# Altium PCB Balance.PcbDoc
Units mil, origin at the board's own origin, x right, y up, seen from the top; angles counter-clockwise.
Board outline 4680 x 2515 mil, 2 copper layers (Top Layer, Bottom Layer); 55 components, 59 nets, 296 pads, 0 vias.
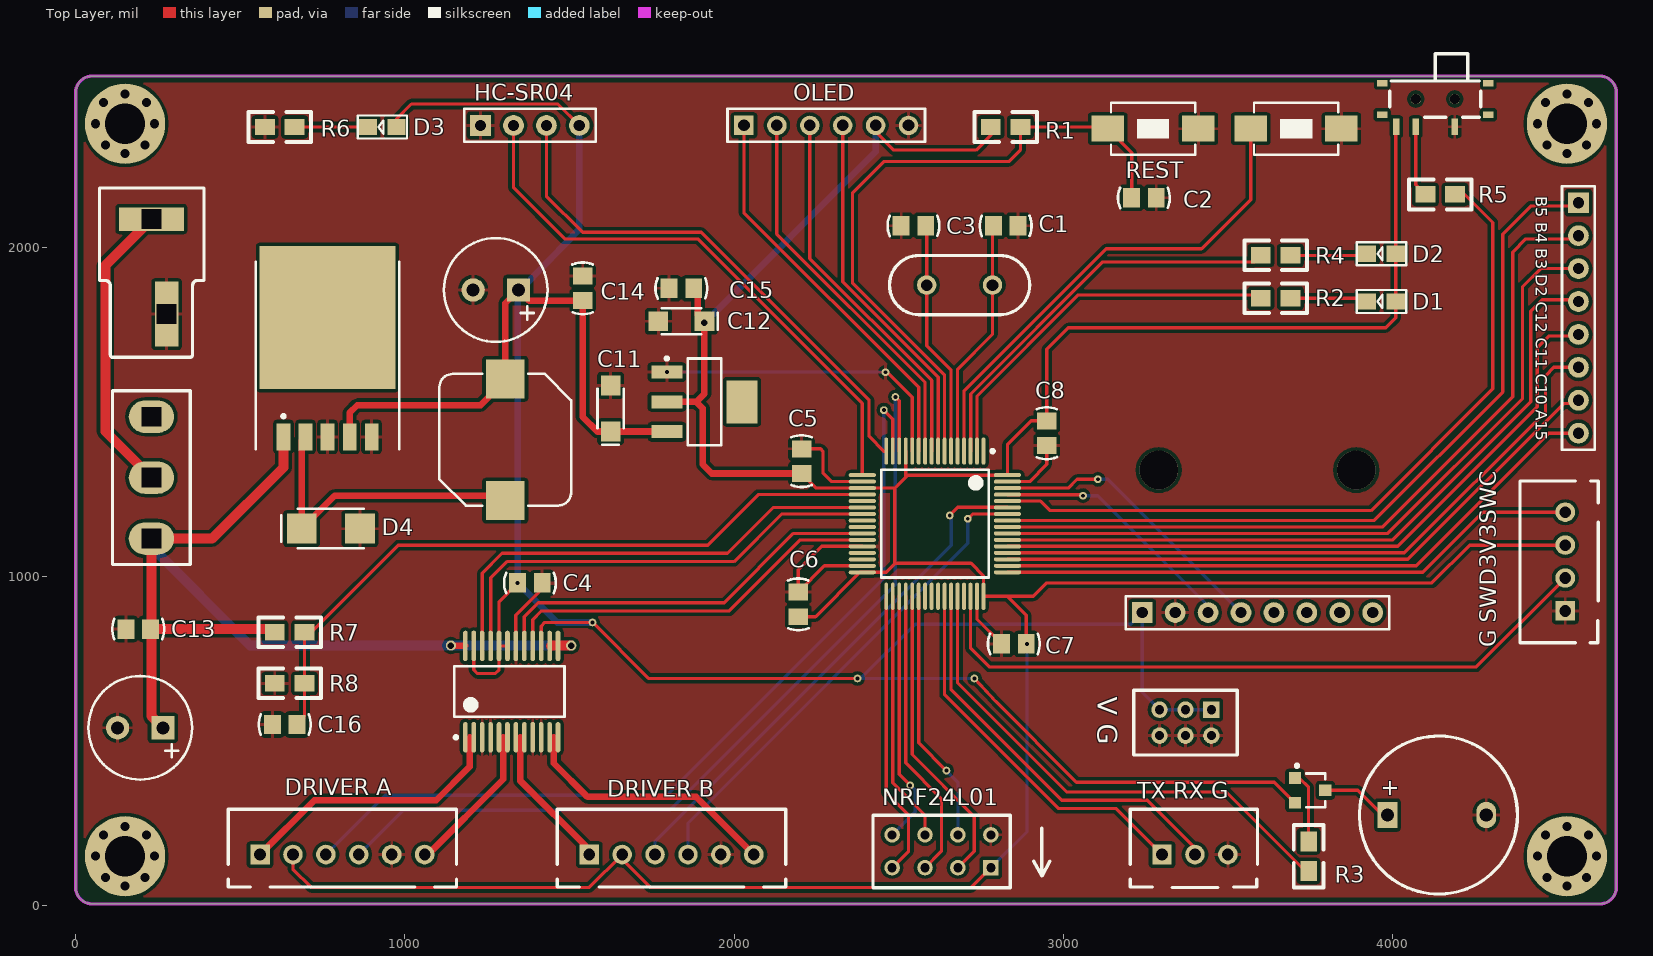
[diagram p0: Top Layer view]
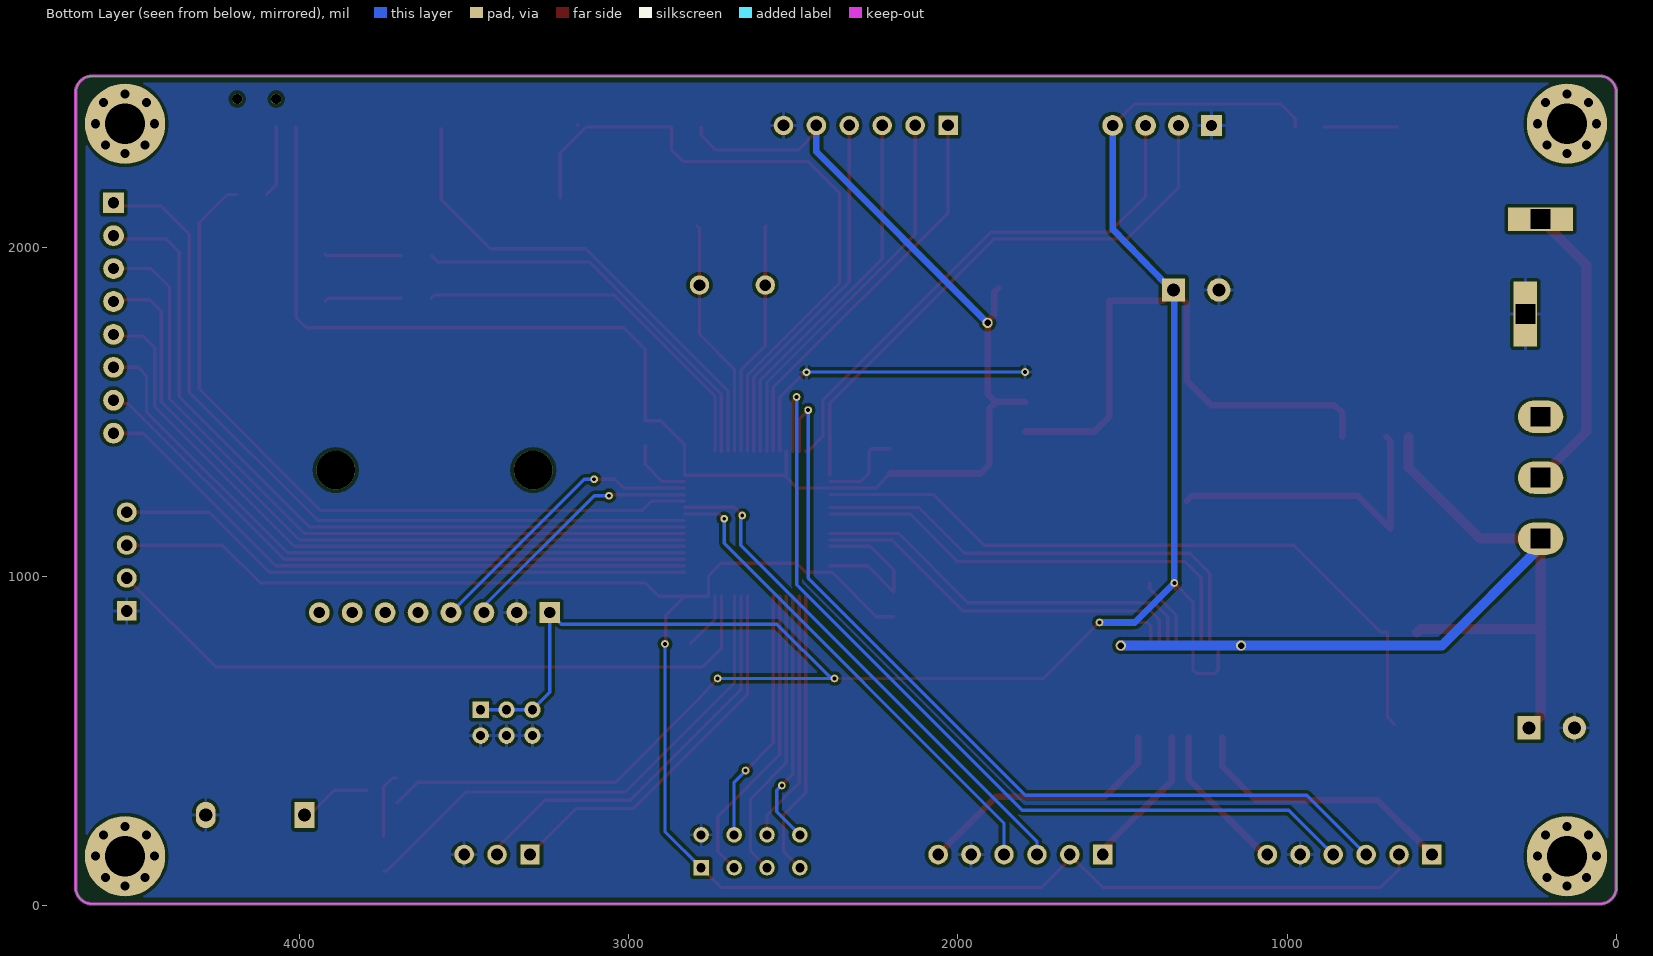
[diagram p1: Bottom Layer view, seen from below]

## Layer stack, top to bottom
Top Solder: solder mask 0.4, Solder Resist, Dk 3.5
Top Layer: signal copper 1.4
Dielectric 1: dielectric 12.6, FR-4, Dk 4.8
Bottom Layer: signal copper 1.4
Bottom Solder: solder mask 0.4, Solder Resist, Dk 3.5

## Board outline
50,5 cw(c50,55) 0,55 0,2470 cw(c50,2470) 50,2520 4630,2520 cw(c4630,2470) 4680,2470 4680,55 cw(c4630,55) 4630,5

## Design rules (kind name [scope] priority, off if disabled: settings)
Clearance POLY-ALL [InPolygon] p1: gap=10 ignorepadtopadclearanceinfootprint=FALSE
Clearance room [WithinRoom('Room32')] p2: gap=0 ignorepadtopadclearanceinfootprint=FALSE
Clearance [All] p3: gap=8 ignorepadtopadclearanceinfootprint=FALSE
PolygonConnect [All] p1: connectstyle=Relief reliefconductorwidth=10 reliefentries=4 polygonreliefangle="90 Angle" airgapwidth=10
RoomDefinition Room32 [All] p1: confinementstyle=ConfineOut formatcopy=TRUE lockcomponents=FALSE outline 2325,1440 2895,1440 2895,875 2325,875
RoutingVias [All] p1: holewidth=28 width=50 viastyle="Through Hole" minholewidth=28 minwidth=50 maxholewidth=28 maxwidth=50
SolderMaskExpansion [All] p1: expansion=2.5
Width [All] p1: maxlimit=35 minlimit=10 preferedwidth=10
30 further rules are at their usual default settings.

## Classes and differential pairs
component class Balance: "B5 B4 B3 D2 C12 C11 C10 A15" C1 C2 C3 C4 C5 C6 C7 C8 C11 C12 C13 C14 C15 C16 D1 D2 D3 D4 "G SWD3V3SWC" HC-SR04 NRF24L01 OLED R1 R2 R3 R4 R5 R6 R7 R8 "TX RX G"

## Components (designator, comment, footprint, x,y, rotation, side; value= is the part's Value field where it differs from the comment)
B1 "BEEP" BEEP 3985,275 r0 top
"B5 B4 B3 D2 C12 C11 C10 A15" "Header 8" SIP8X2.54MM 4565,2135 r270 top (schematic designator P1)
C1 "20pF" C-RAD-0805 2825,2065 r180 top
C2 "104" C-RAD-0805 3245,2150 r180 top
C3 "20pF" C-RAD-0805 2545,2065 r0 top
C4 "104" C-RAD-0805 1380,980 r180 top
C5 "104" C-RAD-0805 2205,1350 r270 top
C6 "104" C-RAD-0805 2195,915 r270 top
C7 "104" C-RAD-0805 2850,795 r0 top
C8 "104" C-RAD-0805 2950,1435 r90 top
C9 "220uF" C-RB-8 265,540 r180 top
C10 "220uF" C-RB-8 1345,1870 r180 top
C11 "10uF" CAP-1206 1625,1510 r90 top
C12 "10uF" CAP-1206 1840,1775 r180 top
C13 "104" C-RAD-0805 190,840 r0 top
C14 "104" C-RAD-0805 1540,1875 r270 top
C15 "104" C-RAD-0805 1840,1875 r0 top
C16 "104" C-RAD-0805 635,550 r0 top
D1 "LED" SMDLED 4010,1835 r180 top
D2 "LED" SMDLED 4010,1980 r180 top
D3 "LED" SMDLED 975,2365 r180 top
D4 "D-Schottky" SMA 775,1145 r180 top
"DRIVER A" "Header 6" XH-6P 560,155 r0 top (schematic designator Driver1)
"DRIVER B" "Header 6" XH-6P 1560,155 r0 top (schematic designator Driver2)
"G SWD3V3SWC" "Header 4" XH-4P 4525,895 r90 top (schematic designator SWD)
H1 "HOLE(S)" HOLE9 150,150 r0 top locked
H2 "HOLE(S)" HOLE9 4530,150 r0 top locked
H3 "HOLE(S)" HOLE9 4530,2375 r0 top locked
H4 "HOLE(S)" HOLE9 150,2375 r0 top locked
HC-SR04 "Header 4" SIP4X2.54MM 1230,2370 r0 top
K2 "KEY_M" SW2P3X6X4.3(SMD) 3705,2360 r270 top
L1 "L" L-SMD-10 1305,1415 r90 top
NRF24L01 "NRF24L01" NRF24L01 2780,215 r90 top (schematic designator U1)
OLED "" SIP6X2.54MM 2030,2370 r0 top
Q1 "SS9012" SOT-23 3750,350 r270 top
R1 "10K" 0805 2870,2365 r180 top
R2 "10K" 0805 3690,1845 r180 top
R3 "1K" 0805 3745.06,105 r90 top
R4 "10K" 0805 3690,1975 r180 top
R5 "10K" 0805 4190,2160.06 r180 top
R6 "10K" 0805 665,2365 r180 top
R7 "10K" 0805 695,830 r180 top
R8 "10K" 0805 605,675 r0 top
REST "KEY_M" SW2P3X6X4.3(SMD) 3275,2360 r90 top (schematic designator K1)
S1 "SW-SPDT" switch 230,1485 r270 top
SW1 "SW3_7" MSK-02-7 4130,2450 r180 top
T "TCON" Tcon 230,2000 r90 top
"TX RX G" "Header 3" XH-3P 3300,155 r0 top (schematic designator USRAT)
U2 "MPU6050" SIP8X2.54MM 3240,890 r0 top
U3 "LM2596T-5.0" TO-263-5 765,1590 r0 top
U4 "AMS1117" AMS-1117 1910,1530 r0 top
U5 "STM32F103R" LQFP-64 2610,1160 r270 top
U6 "TB6612FNG" SSOP-24 1350,650 r90 top
"V G" "Header3X2" HDR3X2 3450,595 r180 top (schematic designator P)
Y1 "8MHz" XTAL 2685,1885 r90 top

## Footprints (in the part's own frame and the unit in brackets; to place one, negate y for a bottom-side part, rotate by r counter-clockwise, add the part's x,y. Pads: shape width x height; smd on the part's side, far side on the other; paste and mask are expansions set on the pad)
0805 [mil]
  rect 60x50 smd: 1(0,-0.06) 2(90,-0.06)
  silkscreen extent -50,-45 140,45
AMS-1117 [mm]
  rect 2.4x1 smd: 1(-2.9,2.3) 2(-2.9,0) 3(-2.9,-2.3)
  rect 2.4x3.3 smd: 4(2.9,0)
  silkscreen extent -3.02,-3.35 1.3,3.47
BEEP [mil]
  rect 60x80 hole 40: 1(0,0)
  oval 60x80 hole 40: 2(300,0)
  silkscreen extent -85,-240 395,240
C-RAD-0805 [mm] "贴片电容"
  rect 1.3x1.5 smd: 1(-0.95,0) 2(0.95,0)
  silkscreen extent -2,-0.79 2,0.79, body extent -1.27,-0.64 1.27,0.64, height 0.9
C-RB-8 [mm] "35V 220UF电容"
  rect 1.8x1.8 hole 1: 1(0,0)
  round 1.8 hole 1: 2(3.5,0)
  silkscreen extent -2.25,-4 5.75,4
CAP-1206 [mil] "贴片元件"
  rect 60x60 smd: 1(-70,0) 2(70,0)
  silkscreen extent -110,-40 60,40, body extent -65,-35 65,35, height 39
HDR3X2 [mm]
  rect 1.27x1.27 hole 0.711: 1(0,0)
  round 1.27 hole 0.711: 2(0,2) 3(2,0) 4(2,2) 5(4,0) 6(4,2)
  silkscreen extent -2,-1.5 6,3.5
HOLE9 [mm]
  round 0.7 hole 0.7: 1(-2.286,0) 1(-1.651,1.651) 1(-1.524,-1.651) 1(0,-2.286) 1(0,2.286) 1(1.524,-1.651) 1(1.651,1.651) 1(2.286,0)
  round 6.2 hole 3.1: 1(0,0)
L-SMD-10 [mm] "贴片电感10*10"
  rect 3x3 smd: 1(-4.699,0) 2(4.699,0)
  silkscreen extent -5.08,-5.08 5.08,5.08, body extent -5.08,-5.08 5.08,5.08, height 4
LQFP-64 [mm] "LQFP64"
  oval 2.1x0.3 smd: 1(-5.6,3.75) 2(-5.6,3.25) 3(-5.6,2.75) 4(-5.6,2.25) 5(-5.6,1.75) 6(-5.6,1.25) 7(-5.6,0.75) 8(-5.6,0.25) 9(-5.6,-0.25) 10(-5.6,-0.75) 11(-5.6,-1.25) 12(-5.6,-1.75) 13(-5.6,-2.25) 14(-5.6,-2.75) 15(-5.6,-3.25) 16(-5.6,-3.75) 33(5.6,-3.75) 34(5.6,-3.25) 35(5.6,-2.75) 36(5.6,-2.25) 37(5.6,-1.75) 38(5.6,-1.25) 39(5.6,-0.75) 40(5.6,-0.25) 41(5.6,0.25) 42(5.6,0.75) 43(5.6,1.25) 44(5.6,1.75) 45(5.6,2.25) 46(5.6,2.75) 47(5.6,3.25) 48(5.6,3.75)
  oval 0.3x2.1 smd: 17(-3.75,-5.6) 18(-3.25,-5.6) 19(-2.75,-5.6) 20(-2.25,-5.6) 21(-1.75,-5.6) 22(-1.25,-5.6) 23(-0.75,-5.6) 24(-0.25,-5.6) 25(0.25,-5.6) 26(0.75,-5.6) 27(1.25,-5.6) 28(1.75,-5.6) 29(2.25,-5.6) 30(2.75,-5.6) 31(3.25,-5.6) 32(3.75,-5.6) 49(3.75,5.6) 50(3.25,5.6) 51(2.75,5.6) 52(2.25,5.6) 53(1.75,5.6) 54(1.25,5.6) 55(0.75,5.6) 56(0.25,5.6) 57(-0.25,5.6) 58(-0.75,5.6) 59(-1.25,5.6) 60(-1.75,5.6) 61(-2.25,5.6) 62(-2.75,5.6) 63(-3.25,5.6) 64(-3.75,5.6)
  silkscreen extent -5.72,-4.15 4.15,4.58, body extent -5,-5 5,5, height 1.6
MSK-02-7 [mm] "拨动开关 7脚 SMD"
  rect 0.8x0.5 smd: 0(-4.1,-1.215) 0(-4.1,1.215) 0(4.1,-1.215) 0(4.1,1.215)
  round 0.8 hole 0.8: 0(-1.5,0) 0(1.5,0)
  rect 0.5x1.25 smd: 1(-1.5,2.134) 2(1.5,2.134) 3(3,2.134)
  silkscreen extent -3.5,-3.5 3.5,1.4
NRF24L01 [mm]
  round 1.2 hole 0.7: 1(0,0) 3(0,2.54) 4(-2.54,2.54) 5(0,5.08) 6(-2.54,5.08) 7(0,7.62) 8(-2.54,7.62)
  rect 1.2x1.2 hole 0.7: 2(-2.54,0)
  silkscreen extent -4.09,-1.5 1.5,9.09
SIP4X2.54MM [mm]
  rect 1.6x1.6 hole 0.87: 1(0,0)
  round 1.6 hole 0.87: 2(2.54,0) 3(5.08,0) 4(7.62,0)
  silkscreen extent -1.27,-1.27 8.89,1.27, body extent -1.27,-1.27 8.89,1.27, height 8.54
SIP6X2.54MM [mm]
  rect 1.5x1.5 hole 0.9: 1(0,0)
  round 1.5 hole 0.9: 2(2.54,0) 3(5.08,0) 4(7.62,0) 5(10.16,0) 6(12.7,0)
  silkscreen extent -1.27,-1.27 13.97,1.27
SIP8X2.54MM [mm]
  rect 1.6x1.6 hole 0.87: 1(0,0)
  round 1.6 hole 0.87: 2(2.54,0) 3(5.08,0) 4(7.62,0) 5(10.16,0) 6(12.7,0) 7(15.24,0) 8(17.78,0)
  silkscreen extent -1.27,-1.27 19.05,1.27, body extent -1.27,-1.27 19.05,1.27, height 8.54
SMA [mm] "贴片二极管"
  rect 2.3x2.3 smd: 1(-2.25,0) 2(2.25,0)
  silkscreen extent -2.54,-1.52 3.81,1.52, body extent -2.92,-1.4 2.92,1.4, height 3
SMDLED [mm]
  rect 1.4x1.27 smd: 1(0.001,-0.002) 2(2.211,-0.002)
  silkscreen extent -0.8,-0.89 3.01,0.89
SOT-23 [mm]
  rect 0.9x0.95 smd: 1(-0.95,-1.175) 2(0.95,-1.175) 3(0,1.175)
  silkscreen extent -2.03,-1.14 1.3,1.18
SSOP-24 [mm] "SSOP, 28-Leads, Body 10.20x5.30mm, Pitch 0.65mm, IPC Low Density"
  oval 2.35x0.36 smd: 1(-3.525,4.225) 2(-3.525,3.575) 3(-3.525,2.925) 4(-3.525,2.275) 5(-3.525,1.625) 6(-3.525,0.975) 7(-3.525,0.325) 8(-3.525,-0.325) 9(-3.525,-0.975) 10(-3.525,-1.625) 11(-3.525,-2.275) 12(-3.525,-2.925) 13(3.525,-2.925) 14(3.525,-2.275) 15(3.525,-1.625) 16(3.525,-0.975) 17(3.525,-0.325) 18(3.525,0.325) 19(3.525,0.975) 20(3.525,1.625) 21(3.525,2.275) 22(3.525,2.925) 23(3.525,3.575) 24(3.525,4.225)
  silkscreen extent -3.65,-3.43 1.95,5.08
SW2P3X6X4.3(SMD) [mm]
  rect 2x2.5 smd: 1(0,3.556) 2(0,-3.444)
  silkscreen extent -2,-3.19 2,3.31, body extent -2.03,-3.18 2.03,3.3, height 1.2
switch [mm]
  oval 2.5x3.5 hole 1.5 square: 1(0,0) 2(4.7,0) 3(9.4,0)
  silkscreen extent -2,-3 11.4,3
Tcon [mm]
  rect 5x1.8 hole 1.5 square: 1(-5.159,-1.175)
  rect 1.8x5 hole 1.5 square: 2(2.159,0)
  silkscreen extent -8.5,-4.06 4.57,4
TO-263-5 [mm] "贴片LM2596"
  rect 1.05x2.1 smd: 1(-3.4,-4.225) 2(-1.7,-4.225) 3(0,-4.225) 4(1.7,-4.225) 5(3.4,-4.225)
  rect 10.5x11 smd: 6(0,4.987)
  silkscreen extent -5.55,-5.17 5.55,9.28, body extent -5.33,-4.7 5.33,10.29, height 3
XH-3P [mm]
  rect 1.5x1.524 hole 0.9: 1(0,0)
  oval 1.5x1.524 hole 0.9: 2(2.54,0) 3(5.08,0)
  silkscreen extent -2.46,-2.54 7.37,3.5
XH-4P [mm]
  rect 1.5x1.524 hole 0.9: 1(0,0)
  oval 1.5x1.524 hole 0.9: 2(2.54,0) 3(5.08,0) 4(7.62,0)
  silkscreen extent -2.46,-2.54 10.03,3.5
XH-6P [mm]
  rect 1.5x1.524 hole 0.9: 1(0,0)
  oval 1.5x1.524 hole 0.9: 2(2.54,0) 3(5.08,0) 4(7.62,0)
  round 1.524 hole 0.9: 5(10.16,0) 6(12.7,0)
  silkscreen extent -2.46,-2.5 15.16,3.5
XTAL [mm] "CRYSTA"
  round 1.5 hole 0.889: 1(0,2.54) 2(0,-2.54)
  silkscreen extent -2.29,-5.41 2.29,5.41

## Part data
B1: "蜂鸣器"
"B5 B4 B3 D2 C12 C11 C10 A15" "DRIVER A" "DRIVER B" "G SWD3V3SWC" HC-SR04 "TX RX G" "V G": "接插件"
C1 C2 C3 C4 C5 C6 C7 C8 C13 C14 C15 C16: library part C, "无极性电容"
C9 C10 C11 C12: library part CAP, "极性电容"
D1 D2 D3: "发光二极管"
D4: "肖特基二极管"
K2 REST: "轻触按键"
L1: "电感"
NRF24L01: "无线模块"
OLED: library part "Header 6", "接插件"
Q1: library part SS8550, "PNP贴片三极管"
R1 R2 R3 R4 R5 R6 R7 R8: library part R
S1: "开关"
SW1: "3脚2档侧面拨动 7Pin微动开关"
T: "T插"
U3: "5V稳压芯片"
U4: "3.3V稳压"
U5: "STM32单片机48引脚"
U6: "电机驱动"
Y1: library part XTAL, "Crystal Oscillator"

## Free pads (board coordinates)
  round 31.5 hole 19.68: 0(1910,1770) 3(1140,790) 3(1505,790)
  round 23.62 hole 11.81: 0(2460,1620) 1(1795.83,1620.55) 2(1342.6,980) 2(2645,410) 2(3105,1295) 3(2535,365) 3(3060,1245) 4(2455,1505) 4(2730,690) 5(2490,1545) 6(2710,1175) 6(2890,795) 7(1570,860) 7(2655,1185) 8(2375,690)
  round 118.11 hole 118.11: 0(3290,1323.07) 0(3890,1323.07)

## Nets (pads, with @x,y where several pads share a name; then routed paths per layer and width w, separated by ;. In a path a pad name is that pad's centre, name@x,y a point inside that pad or via, vN(x,y) a via of type N, cw(c..) or ccw(c..) an arc to the next point about the centre after c; other vN are vias at no path point)
3V3: "DRIVER A.2" "DRIVER B.2" "G SWD3V3SWC.3" C5.2 C6.2 C7.2 C8.2 C12.1 C15.2 D1.1 D2.1 NRF24L01.2 OLED.5 pad.0@1910,1770 pad.6@2890,795 R1.2 SW1.3 U4.2 U5.13 U5.19 U5.32 U5.48 U5.64 | length 11068.1
  Top Layer w10: 660,155 660,110 715,55 1560,55 1660,155 1660,140 1745,55 2720,55 NRF24L01.2 ; C6.2 2247.6,877.6 2382.36,1012.36 U5.32 2462.36,1012.36 2490,1040 2720,1040 2757.64,1002.36 U5.48 2830,939.53 ; C5.2 2249.33,1268.27 U5.19 2488.27,1268.27 ; OLED.5 2430,2350 2485,2295 2735,2295 2780,2340 R1.2 ; 2488.27,1038.27 2488.27,1268.27 ; U5.13 2521.42,1301.42 ; pad.6@2890,795 2889.92,795.44 2887.4,810 2887.4,882.13 2830,939.53 ; SW1.3 4009.97,2364.08 D2.1 D1.1 4009.97,1784.97 3980,1755 3015,1755 2950,1690 C8.2 2902.4,1472.4 2830.47,1400.47 U5.64 2527.64,1307.64 2521.42,1301.42 ; 4525,1095 4235,1095 4120,980 2950,980 2909.53,939.53 2830,939.53 ; 2488.27,1268.27 2521.42,1301.42
  Top Layer w20: U4.2 1885,1530 ; C15.2 1890,1862.4 1890,1795 C12.1 1910,1770 1910,1555 1885,1530 ; C5.2 1932.4,1312.6 1905,1340 1905,1510 1885,1530
  Bottom Layer w10: NRF24L01.2 2890,225 pad.6@2890,795
  Bottom Layer w20: pad.0@1910,1770 2430,2290 OLED.5
5V: "V G.1" "V G.3" "V G.5" C4.2 C10.1 C11.1 C14.2 D3.1 HC-SR04.4 L1.2 pad.2@1342.6,980 pad.4@2730,690 pad.7@1570,860 pad.8 Q1.2 U2.1 U3.4 U4.3 U6.15 U6.19 U6.20 U6.23 | length 8563.7
  Top Layer w10: D3.1 974.97,2389.97 1020,2435 1465,2435 HC-SR04.4 ; U6.23 1209.25,715.75 1220,705 1275,705 1286.02,716.02 U6.20 ; U6.19 U6.20 ; C4.2@1340,960 C4.2 1286.02,923.43 U6.20 ; U6.15 1413.98,848.98 1425,860 1570,860 1740,690 pad.8 ; pad.4@2730,690 2795,620 3040,375 3641.34,375 Q1.2
  Top Layer w20: U3.4 831.93,1496.93 855,1520 1230,1520 1305,1595 L1.2 1305,1830 C10.1 1377.4,1837.6 C14.2 1540,1485 1585,1440 C11.1 1795.27,1440 U4.3
  Bottom Layer w10: pad.8 pad.8@2385,690 ; pad.4@2730,690 pad.8@2385,690 ; 3450,595 3371.26,595 3292.52,595 3240,647.52 U2.1 3205,855 2550,855 pad.8@2385,690
  Bottom Layer w20: C10.1 1342.6,1867.6 1342.6,980 1462.6,860 pad.7@1570,860 ; C10.1@1360,1870 1360,1880 1530,2055 HC-SR04.4
ADC: C16.2 R7.1 R8.2 U5.20 | length 2157.3
  Top Layer w10: C16.2 695,572.6 R7.1 715.06,830.06 980,1095 1920,1095 2073.58,1248.58 U5.20
AO1: "DRIVER A.1" U6.1 U6.2 | length 836.6
  Top Layer w20: 560,155 725,320 1095,320 1196.46,421.46 1196.46,511.22
AO2: "DRIVER A.6" U6.5 U6.6 | length 461
  Top Layer w20: 1060,155 1070,155 1298.82,383.82 1298.82,511.22
BEEP: R3.1 U5.44 | length 1566.2
  Top Layer w10: U5.44 2678.9,676.1 3010,345 3495,345 3735,105 R3.1
BO1: "DRIVER B.1" U6.7 U6.8 | length 443.2
  Top Layer w20: 1350,511.22 1350,380 1560,170 1560,155
BO2: "DRIVER B.6" U6.11 U6.12 | length 801.2
  Top Layer w20: 1452.36,511.22 1452.36,432.64 1555,330 1885,330 2060,155
BOOT0: R5.1 U5.60 | length 2295
  Top Layer w10: U5.60 2931.1,1228.9 2960,1200 3935,1200 4305,1570 4305,2075 4219.94,2160.06 R5.1
D/C: OLED.1 U5.11 | length 1209.4
  Top Layer w10: OLED.1 2030,2105 2560.79,1574.21 U5.11
ECHO: HC-SR04.2 U5.17 | length 1738.5
  Top Layer w10: HC-SR04.2 1330,2180 1485,2025 1890,2025 2389.53,1525.47 U5.17
GND: "DRIVER A.5" "DRIVER B.5" "G SWD3V3SWC.1" "TX RX G.3" "V G.2" "V G.4" "V G.6" B1.2 C1.1 C2.1 C3.1 C4.1 C5.1 C6.1 C7.1 C8.1 C9.2 C10.2 C11.2 C12.2 C13.1 C14.1 C15.1 C16.1 D4.1 HC-SR04.1 K2.1 NRF24L01.1 OLED.6 pad.0@2460,1620 pad.1 R6.2 R8.1 REST.2 SW1.1 T.1 U2.2 U3.3 U3.5 U4.1 U5.12 U5.18 U5.28 U5.31 U5.47 U5.63 U6.3 U6.4 U6.9 U6.10 U6.18 | length 2309.8
  Top Layer w10: U6.18 1337.2,882.2 1417.4,962.4 C4.1 ; C5.1 2262.6,1387.4 2270,1380 2270,1315 2297.05,1287.95 U5.18 ; U5.31 2274.65,1032.05 C6.1 2195,1020 2266.1,1091.1 U5.28 ; pad.0@2470,1615 2541.1,1543.9 U5.12 ; U5.47 2737.95,869.65 C7.1 ; U5.63 2897.95,1287.95 2950,1340 C8.1
  Bottom Layer w10: pad.1 2459.45,1620.55 pad.0@2460,1620
IICSCL: pad.3@3060,1245 U2.3 U5.61 | length 771.4
  Top Layer w10: U5.61 2831.25,1247.8 3060,1247.8 pad.3@3060,1245
  Bottom Layer w10: pad.3@3060,1245 3105,1245 3440,910 U2.3
IICSDA: pad.2@3105,1295 U2.4 U5.62 | length 888.4
  Top Layer w10: U5.62 3015,1268.27 3041.73,1295 pad.2@3105,1295
  Bottom Layer w10: pad.2@3105,1295 3135,1295 U2.4
KEY1: K2.2 U5.4 | length 1510.1
  Top Layer w10: U5.4 2698.58,1563.58 3130,1995 3420,1995 3569.41,2144.41 K2.2
LED1: R2.2 U5.2 | length 1160.6
  Top Layer w10: U5.2 2737.95,1547.5 3045.46,1855 3590.06,1855 R2.2
LED2: R4.2 U5.3 | length 1229.7
  Top Layer w10: U5.3 2719.05,1380.47 2719.05,1554.05 3120.06,1955.06 3580,1955.06 R4.2
NetB1_1: B1.1 Q1.3 | length 211.9
  Top Layer w10: Q1.3 3895,350 B1.1@3975,270
NetD1_2: D1.2 R2.1 | length 237.1
  Top Layer w10: R2.1 3912.96,1845.06 D1.2
NetD2_2: D2.2 R4.1 | length 235
  Top Layer w10: R4.1 3917.96,1975.06 D2.2
NetD3_2: D3.2 R6.1 | length 223
  Top Layer w10: R6.1 D3.2
NetD4_2: D4.2 L1.1 U3.2 | length 949.7
  Top Layer w20: U3.2 686.42,1412.01 D4.2 786.42,1245 1290,1245 L1.1
NetP1_1: "B5 B4 B3 D2 C12 C11 C10 A15.1" U5.57 | length 2411.3
  Top Layer w10: U5.57 3944.84,1169.84 4335,1560 4335,2040 4420,2125 4565,2125
NetP1_2: "B5 B4 B3 D2 C12 C11 C10 A15.2" U5.56 | length 2354.6
  Top Layer w10: U5.56 3970.16,1150.16 4365,1545 4365,1985 4405,2025 4565,2025
NetP1_3: "B5 B4 B3 D2 C12 C11 C10 A15.3" U5.55 | length 2266.9
  Top Layer w10: U5.55 3985.47,1130.47 4395,1540 4395,1880 4450,1935 4565,1935
NetP1_4: "B5 B4 B3 D2 C12 C11 C10 A15.4" U5.54 | length 2197.7
  Top Layer w10: U5.54 4000.79,1110.79 4420,1530 4420,1805 4455,1840 4565,1840
NetP1_5: "B5 B4 B3 D2 C12 C11 C10 A15.5" U5.53 | length 2104.6
  Top Layer w10: U5.53 4016.1,1091.1 4440,1515 4440,1695 4475,1730 4565,1730
NetP1_6: "B5 B4 B3 D2 C12 C11 C10 A15.6" U5.52 | length 2032.4
  Top Layer w10: U5.52 4036.42,1071.42 4465,1500 4465,1610 4490,1635 4565,1635
NetP1_7: "B5 B4 B3 D2 C12 C11 C10 A15.7" U5.51 | length 1930.6
  Top Layer w10: U5.51 4046.73,1051.73 4520,1525 4565,1525
NetP1_8: "B5 B4 B3 D2 C12 C11 C10 A15.8" U5.50 | length 1901.4
  Top Layer w10: U5.50 4072.05,1032.05 4475,1435 4565,1435
NetQ1_1: Q1.1 R3.2 | length 202.6
  Top Layer w10: Q1.1 3717.6,387.4 3745.06,359.94 R3.2@3745.06,210
NetR5_2: R5.2 SW1.2 | length 217.9
  Top Layer w10: SW1.2 4070.94,2189.18 R5.2
NetS1_2: S1.2 T.2 | length 901
  Top Layer w30: S1.2 90,1439.96 90,1945 T.2
NRF_CE: NRF24L01.3 pad.2@2645,410 U5.38 | length 773.9
  Top Layer w10: U5.38 2560.79,494.21 pad.2@2645,410
  Bottom Layer w10: pad.2@2645,410 2680,375 NRF24L01.3
NRF_CS: NRF24L01.4 U5.37 | length 923.5
  Top Layer w10: U5.37 2541.1,458.9 2730,270 2730,165 NRF24L01.4
NRF_IRQ: NRF24L01.8 U5.33 | length 873.3
  Top Layer w10: U5.33 2462.36,342.64 2530,275 2530,165 NRF24L01.8
OSCIN: C1.2 U5.5 Y1.2 | length 731.6
  Top Layer w10: U5.5 2678.9,1628.9 2785,1735 Y1.2 2785,2057.4 C1.2@2792.6,2065
OSCOUT: C3.2 U5.6 Y1.1 | length 716.3
  Top Layer w10: C3.2 2585,2062.4 Y1.1 2585,1700 2659.21,1625.79 U5.6
PA0: "DRIVER A.4" pad.5 U5.14 | length 2709
  Top Layer w10: pad.5 2501.73,1533.27 U5.14
  Bottom Layer w10: 860,155 995,290 1805,290 2490,975 pad.5
PA1: "DRIVER A.3" pad.4@2455,1505 U5.15 | length 2688.7
  Top Layer w10: pad.4@2455,1505 2482.05,1477.95 U5.15
  Bottom Layer w10: 760,155 940,335 1795,335 2455,995 pad.4@2455,1505
PA6: U5.22 U6.22 | length 1458.3
  Top Layer w10: U6.22 1234.84,1009.84 1295,1070 1980,1070 2119.21,1209.21 U5.22
PA7: U5.23 U6.21 | length 1416.1
  Top Layer w10: U6.21 1260.43,995.43 1310,1045 2000,1045 2144.53,1189.53 U5.23
PB0: U5.26 U6.17 | length 1220.4
  Top Layer w10: U6.17 1362.8,877.8 1405,920 1970,920 2180.47,1130.47 U5.26
PB1: U5.27 U6.16 | length 1181.2
  Top Layer w10: U6.16 1388.39,868.39 1415,895 1985,895 2200.79,1110.79 U5.27
PB6: "DRIVER B.4" pad.6@2710,1175 U5.58 | length 1498.6
  Top Layer w10: pad.6@2710,1175 2724.53,1189.53 U5.58
  Bottom Layer w10: 1860,155 1860,250 2710,1100 pad.6@2710,1175
PB7: "DRIVER B.3" pad.7@2655,1185 U5.59 | length 1591.2
  Top Layer w10: pad.7@2655,1185 2679.81,1209.81 2830.47,1209.81 U5.59
  Bottom Layer w10: 1760,155 1760,195 2660,1095 2660,1180 pad.7@2655,1185
RESET: C2.2 R1.1 REST.1 U5.7 | length 2034.3
  Top Layer w10: U5.7 2639.53,1610.93 2360,1890.46 2360,2165 2455,2260 2835,2260 2870,2295 R1.1 REST.1@3129.94,2365.06 ; REST.1 3207.6,2287.4 C2.2 ; REST.1@3154.94,2370.06 REST.1@3155,2370
RST: OLED.2 U5.10 | length 1176.1
  Top Layer w10: OLED.2 2130,2040 2580,1590 2580,1380.94 U5.10
RX: "TX RX G.2" U5.43 | length 1243.7
  Top Layer w10: U5.43 2659.21,655.79 2995,320 3255,320 3400,175 3400,155
SCL: OLED.4 U5.8 | length 1109.6
  Top Layer w10: OLED.4 2330,1895 2619.84,1605.16 U5.8
SDA: OLED.3 U5.9 | length 1142.9
  Top Layer w10: OLED.3 2230,1965.46 2600.16,1595.3 U5.9
SPI2_MISO: NRF24L01.7 pad.3@2535,365 U5.35 | length 773.5
  Top Layer w10: U5.35 2501.73,398.27 pad.3@2535,365
  Bottom Layer w10: NRF24L01.7 2550,285 2550,350 pad.3@2535,365
SPI2_MOSI: NRF24L01.6 U5.36 | length 890.2
  Top Layer w10: U5.36 2521.42,433.58 2630,325 2630,165 NRF24L01.6
SPI2_SCK: NRF24L01.5 U5.34 | length 765.1
  Top Layer w10: U5.34 2482.05,372.95 2580,275 NRF24L01.5
SWC: "G SWD3V3SWC.4" U5.49 | length 1770.2
  Top Layer w10: U5.49 4092.36,1012.36 4275,1195 4525,1195
SWD: "G SWD3V3SWC.2" U5.46 | length 2099.9
  Top Layer w10: U5.46 2718.27,781.73 2775,725 4255,725 4525,995
TRIG: HC-SR04.3 U5.16 | length 1632.6
  Top Layer w10: HC-SR04.3 1430,2155 1540,2045 1900,2045 2410,1535 2410,1425 2454.53,1380.47 U5.16
TX: "TX RX G.1" U5.42 | length 1160.6
  Top Layer w10: U5.42 2639.53,640.47 2985,295 3160,295 3300,155
VCC: C9.1 C13.2 pad.3@1140,790 pad.3@1505,790 R7.2 S1.3 U3.1 U6.13 U6.14 U6.24 | length 3084.2
  Top Layer w20: pad.3@1140,790 1141.22,788.78 U6.24
  Top Layer w30: C13.2 C13.2@230,840 ; C9.1 230,575 C13.2@230,840 ; R7.2 595.06,840 C13.2@230,840 ; U3.1 631.14,1331.14 414.92,1114.92 S1.3 C13.2@230,840 ; U6.14@1444.06,788.78 1445.28,790 pad.3@1505,790
  Bottom Layer w30: S1.3 230,1090 530,790 1140,790 pad.3@1505,790
pads on no net: H1.1 H2.1 H3.1 H4.1 S1.1 SW1.0 U2.5 U2.6 U2.7 U2.8 U3.6 U4.4 U5.1 U5.21 U5.24 U5.25 U5.29 U5.30 U5.39 U5.40 U5.41 U5.45

## Polygon pours and split planes (outlines as drawn)
GND on Top Layer "Top Layer-No Net" (solid, remove dead copper, pour order 5): 25,2500 25,25 4650,25 4650,2500
GND on Bottom Layer "Top Layer-No Net" (solid, remove dead copper, pour order 7): 25,2500 25,30 20,25 4650,25 4650,2500

## Keep-outs
Keep-Out Layer:
  the board outline again, w10

## Silkscreen, mask and mechanical layers (free items; w line width, h text height)
Top Overlay:
  lines w10: 2910,135 2935,90 ; 2935,235 2935,90 ; 2960,135 2935,90

## Text inside footprints (layer, text, board x,y; h text height)
B1: Top Overlay "+" at 3965,335 h50